# EAGLE board MPR121-Cap-Touch-Keypad-Panel-v13 (EAGLE 6.5.0)
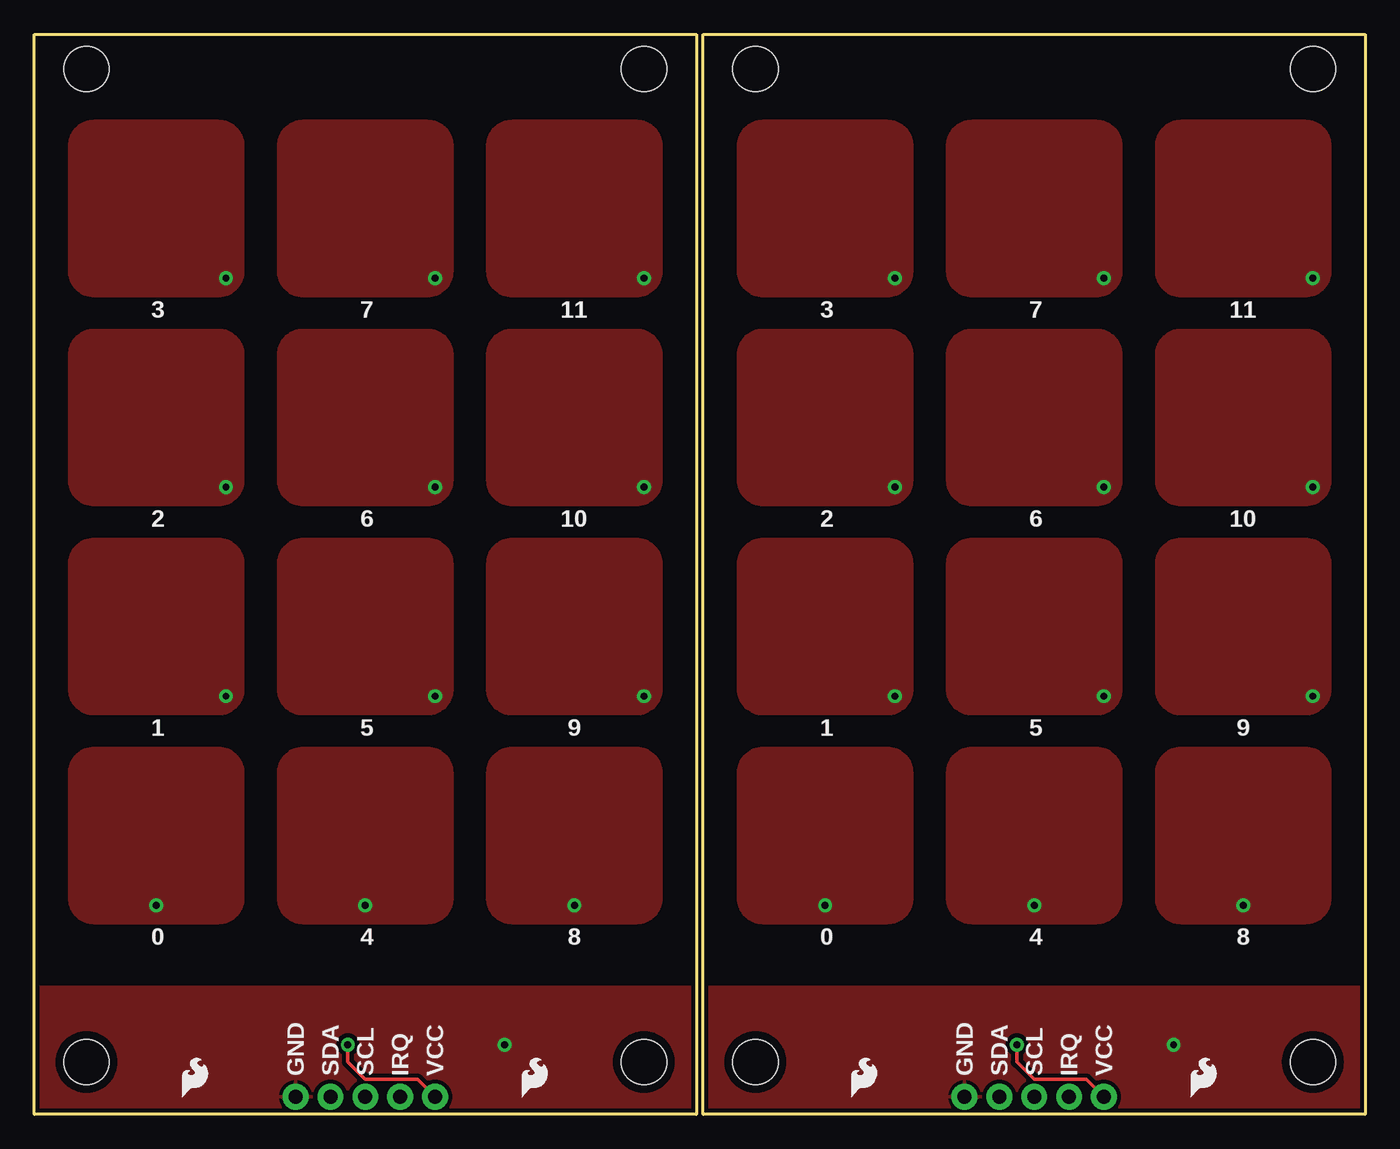
[diagram p0: board, top side]
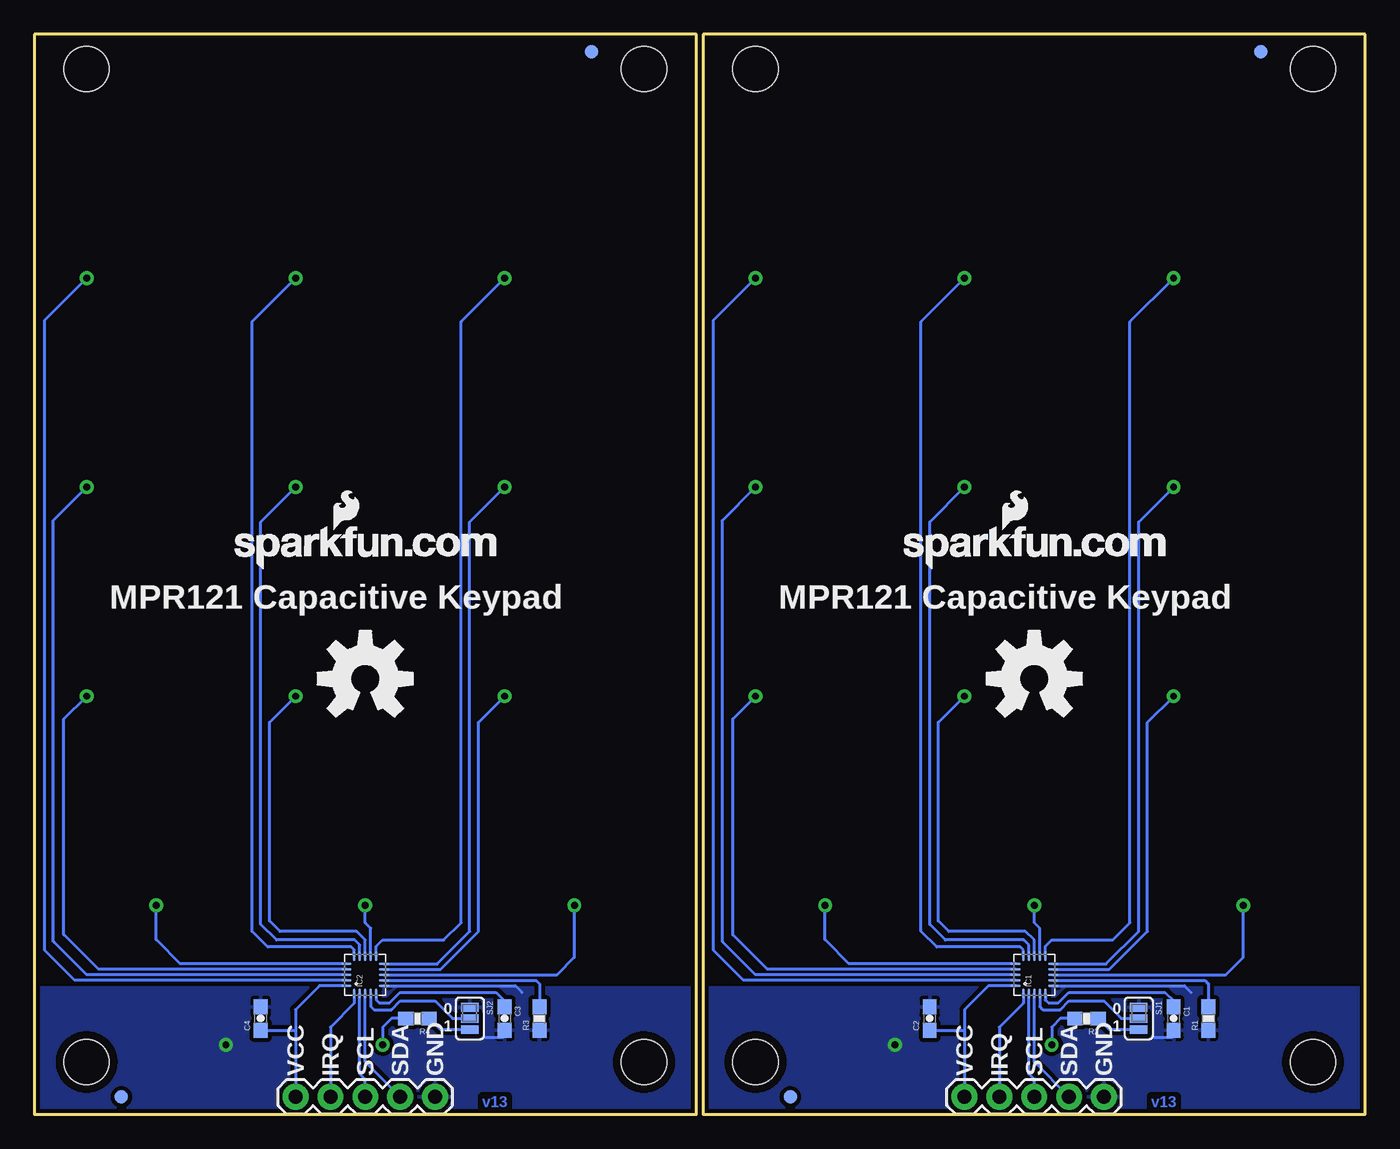
[diagram p1: board, bottom side, seen from below]

Size 97.03 x 78.74 mm. Coordinates in mm from the lower left corner, seen from the top.
Outline: 48.26,0 0,0 0,78.74 48.26,78.74 48.26,0
Outline: 97.03,0 48.77,0 48.77,78.74 97.03,78.74 97.03,0
Copper layers (1*16): Top 0.035mm / dielectric 1.5mm / Bottom 0.035mm
Design rules "SparkFun *": minimum track width 8mil, minimum drill 20mil, track to track 8mil, track to pad 8mil, pad to pad 8mil, via to via 8mil, smd to smd 8mil, copper to edge 8mil, drill to drill 8mil, minimum pad ring 12mil, minimum via ring 10mil, stop-mask expansion 4mil, vias tented up to drill 20mil, thermal gap 10mil

## Footprints (pad centres in the part's own frame; a part is rotated, then mirrored left to right if it is on the bottom)
0603-CAP = smd 1.1 x 1: 1 -0.85,0; 2 0.85,0
QFN-20-0.4MM-V2 = smd 0.75 x 0.195: 1 -1.367,0.8; 2 -1.367,0.4; 3 -1.367,0; 4 -1.367,-0.4; 5 -1.367,-0.8; 11 1.375,-0.8; 12 1.375,-0.4; 13 1.375,0; 14 1.375,0.4; 15 1.375,0.8 | smd 0.195 x 0.75: 6 -0.795,-1.372; 7 -0.395,-1.372; 8 0.005,-1.372; 9 0.405,-1.372; 10 0.805,-1.372; 16 0.81,1.372; 17 0.41,1.372; 18 0.01,1.372; 19 -0.39,1.372; 20 -0.79,1.372
STAND-OFF = hole 3.302: 0,0
FIDUCIAL-1X2 = smd 1 x 1: 1 0,0
1X05 = drill 1.016 pad 1.88: 1 0,0; 2 2.54,0; 3 5.08,0; 4 7.62,0; 5 10.16,0
0603-RES = smd 1.1 x 1: 1 -0.85,0; 2 0.85,0
SJ_3_PASTE1&2 = smd 0.635 x 1.27: 1 -0.813,0; 2 0,0; 3 0.813,0

## Placement (x,y rotation side)
C1  0.1uF  [0603-CAP]  13.97,6.99 270 bottom
C2  0.1uF  [0603-CAP]  31.75,6.99 90 bottom
C3  0.1uF  [0603-CAP]  62.74,6.99 270 bottom
C4  0.1uF  [0603-CAP]  80.52,6.99 90 bottom
IC1  MPR121  [QFN-20-0.4MM-V2]  24.13,10.16 90 bottom
IC2  MPR121  [QFN-20-0.4MM-V2]  72.9,10.16 90 bottom
JP1  LOGO-SFENEW  [SFE-NEW-WEBLOGO]  33.66,39.75 0 bottom
JP2  LOGO-SFESK  [SFE-LOGO-FLAME]  10.79,1.27 0 top
JP3  STAND-OFF  [STAND-OFF]  44.45,3.81 0 bottom
JP4  STAND-OFF  [STAND-OFF]  3.81,3.81 0 bottom
JP5  FIDUCIAL1X2  [FIDUCIAL-1X2]  7.62,77.47 0 bottom
JP6  LOGO-SFESK  [SFE-LOGO-FLAME]  35.56,1.27 0 top
JP7  STAND-OFF  [STAND-OFF]  44.45,76.2 0 bottom
JP8  STAND-OFF  [STAND-OFF]  3.81,76.2 0 bottom
JP9  [1X05]  19.05,1.27 180 bottom
JP10  FIDUCIAL1X2  [FIDUCIAL-1X2]  41.91,1.27 0 bottom
JP11  LOGO-SFENEW  [SFE-NEW-WEBLOGO]  82.42,39.75 0 bottom
JP12  STAND-OFF  [STAND-OFF]  93.22,3.81 0 bottom
JP13  STAND-OFF  [STAND-OFF]  52.58,3.81 0 bottom
JP14  LOGO-SFESK  [SFE-LOGO-FLAME]  59.56,1.27 0 top
JP15  LOGO-SFESK  [SFE-LOGO-FLAME]  84.33,1.27 0 top
JP16  STAND-OFF  [STAND-OFF]  93.22,76.2 0 bottom
JP17  STAND-OFF  [STAND-OFF]  52.58,76.2 0 bottom
JP18  [1X05]  67.82,1.27 180 bottom
JP19  FIDUCIAL1X2  [FIDUCIAL-1X2]  56.39,77.47 0 bottom
JP20  FIDUCIAL1X2  [FIDUCIAL-1X2]  90.68,1.27 0 bottom
LOGO1  OSHW-LOGOL  [OSHW-LOGO-L]  24.13,31.75 0 bottom
LOGO2  OSHW-LOGOL  [OSHW-LOGO-L]  72.9,31.75 0 bottom
R1  75k  [0603-RES]  11.43,6.99 90 bottom
R2  10K  [0603-RES]  20.32,6.99 180 bottom
R3  75k  [0603-RES]  60.2,6.99 90 bottom
R4  10K  [0603-RES]  69.09,6.99 180 bottom
SJ1  [SJ_3_PASTE1&2]  16.51,6.99 270 bottom
SJ2  [SJ_3_PASTE1&2]  65.28,6.99 270 bottom

## Library data of the parts
C1-C4 = SparkFun-Capacitors; PROD_ID: CAP-00810
IC1 IC2 = SparkFun-Sensors
JP1-JP20 R1 R3 = SparkFun
LOGO1 LOGO2 = SparkFun-Aesthetics
R2 R4 = SparkFun-Resistors; PROD_ID: RES-00824
SJ1 SJ2 = SparkFun-Passives

## Nets
GND: C1.2 C2.2 IC1.6 JP9.1 R1.1 SJ1.1
GND1: C3.2 C4.2 IC2.6 JP18.1 R3.1 SJ2.1
KEY0: IC1.8
KEY1: IC1.9
KEY2: IC1.10
KEY3: IC1.11
KEY4: IC1.12
KEY5: IC1.13
KEY6: IC1.14
KEY7: IC1.15
KEY8: IC1.16
KEY9: IC1.17
KEY10: IC1.18
KEY11: IC1.19
KEY12: IC2.19
KEY13: IC2.18
KEY14: IC2.17
KEY15: IC2.16
KEY16: IC2.15
KEY17: IC2.14
KEY18: IC2.13
KEY19: IC2.12
KEY20: IC2.11
KEY21: IC2.10
KEY22: IC2.9
KEY23: IC2.8
N$1: IC1.4 SJ1.2
N$2: R2.1 SJ1.3
N$3: IC2.4 SJ2.2
N$4: R4.1 SJ2.3
REXT: IC1.7 R1.2
REXT1: IC2.7 R3.2
SCL: IC1.2 JP9.3
SCL1: IC2.2 JP18.3
SDA: IC1.3 JP9.2
SDA1: IC2.3 JP18.2
VCC: C2.1 IC1.20 JP9.5 R2.2
VCC1: C4.1 IC2.20 JP18.5 R4.2
VREG: C1.1 IC1.5
VREG1: C3.1 IC2.5
~IRQ: IC1.1 JP9.4
~IRQ1: IC2.1 JP18.4

## Tracks (layer width: path | path; a pad name or v marks a point on that pad's centre or on a via)
GND  (via drill 0.51)
  Bottom 0.203: 14.1,5.59 15.37,5.59 | IC1.6 13.18,9.37 12.7,8.89
  other vias: 34.29,5.08
  pour Top (isolate 0.305): 48.26,0 48.13,9.27 0,9.27 0,0
  pour Bottom (isolate 0.305): 48.26,0 48.26,9.27 0,9.27 0,0
GND1  (via drill 0.51)
  Bottom 0.203: 62.87,5.59 64.14,5.59 | IC2.6 61.94,9.37 61.47,8.89
  other vias: 83.06,5.08
  pour Top (isolate 0.305): 97.03,0 96.9,9.27 48.77,9.27 48.77,0
  pour Bottom (isolate 0.305): 97.03,0 97.03,9.27 48.77,9.27 48.77,0
KEY0  (via drill 0.51)
  Bottom 0.203: v8.89,15.24 8.89,11.43 8.9,11.43 10.16,10.16 IC1.8
  pour Top (isolate 0.305): 13.44,13.97 arc90 15.24,15.77 15.24,24.87 arc90 13.44,26.67 4.34,26.67 arc90 2.54,24.87 2.54,15.77 arc90 4.34,13.97
KEY1  (via drill 0.51)
  Bottom 0.203: v13.97,30.48 15.88,28.57 15.88,13.34 18.66,10.56 IC1.9
  pour Top (isolate 0.305): 15.24,40.11 arc90 13.44,41.91 4.34,41.91 arc90 2.54,40.11 2.54,31.01 arc90 4.34,29.21 13.44,29.21 arc90 15.24,31.01
KEY2  (via drill 0.51)
  Bottom 0.203: v13.97,45.72 16.51,43.18 16.51,13.34 16.52,13.34 18.89,10.96 IC1.10
  pour Top (isolate 0.305): 15.24,55.35 arc90 13.44,57.15 4.34,57.15 arc90 2.54,55.35 2.54,46.25 arc90 4.34,44.45 13.44,44.45 arc90 15.24,46.25
KEY3  (via drill 0.51)
  Bottom 0.203: v13.97,60.96 17.14,57.78 17.14,13.97 18.41,12.7 22.86,12.7 23.33,12.23 IC1.11
  pour Top (isolate 0.305): 15.24,70.59 arc90 13.44,72.39 4.34,72.39 arc90 2.54,70.59 2.54,61.49 arc90 4.34,59.69 13.44,59.69 arc90 15.24,61.49
KEY4  (via drill 0.51)
  Bottom 0.203: v24.13,15.24 24.13,13.97 23.73,13.57 IC1.12
  pour Top (isolate 0.305): 28.68,13.97 arc90 30.48,15.77 30.48,24.87 arc90 28.68,26.67 19.58,26.67 arc90 17.78,24.87 17.78,15.77 arc90 19.58,13.97
KEY5  (via drill 0.51)
  Bottom 0.203: v29.21,30.48 31.11,28.57 31.11,14.1 30.35,13.34 24.77,13.34 24.13,12.7 IC1.13
  pour Top (isolate 0.305): 30.48,40.11 arc90 28.68,41.91 19.58,41.91 arc90 17.78,40.11 17.78,31.01 arc90 19.58,29.21 28.68,29.21 arc90 30.48,31.01
KEY6  (via drill 0.51)
  Bottom 0.203: v29.21,45.72 31.75,43.18 31.75,13.84 30.61,12.7 24.89,12.7 24.53,12.34 IC1.14
  pour Top (isolate 0.305): 30.48,55.35 arc90 28.68,57.15 19.58,57.15 arc90 17.78,55.35 17.78,46.25 arc90 19.58,44.45 28.68,44.45 arc90 30.48,46.25
KEY7  (via drill 0.51)
  Bottom 0.203: v29.21,60.96 32.38,57.78 32.38,13.34 31.24,12.19 25.15,12.19 24.93,11.98 IC1.15
  pour Top (isolate 0.305): 30.48,70.59 arc90 28.68,72.39 19.58,72.39 arc90 17.78,70.59 17.78,61.49 arc90 19.58,59.69 28.68,59.69 arc90 30.48,61.49
KEY8  (via drill 0.51)
  Bottom 0.203: v39.37,15.24 39.37,12.7 39.35,12.7 37.62,10.97 IC1.16
  pour Top (isolate 0.305): 45.72,24.87 arc90 43.92,26.67 34.82,26.67 arc90 33.02,24.87 33.02,15.77 arc90 34.82,13.97 43.92,13.97 arc90 45.72,15.77
KEY9  (via drill 0.51)
  Bottom 0.203: v44.45,30.48 46.1,28.83 46.1,13.08 46.08,13.08 43.57,10.57 IC1.17
  pour Top (isolate 0.305): 45.72,40.11 arc90 43.92,41.91 34.82,41.91 arc90 33.02,40.11 33.02,31.01 arc90 34.82,29.21 43.92,29.21 arc90 45.72,31.01
KEY10  (via drill 0.51)
  Bottom 0.203: v44.45,45.72 46.86,43.31 46.86,12.57 46.84,12.57 44.44,10.17 IC1.18
  pour Top (isolate 0.305): 33.02,46.25 arc90 34.82,44.45 43.92,44.45 arc90 45.72,46.25 45.72,55.35 arc90 43.92,57.15 34.82,57.15 arc90 33.02,55.35
KEY11  (via drill 0.51)
  Bottom 0.203: v44.45,60.96 47.5,57.91 47.5,11.94 45.33,9.77 IC1.19
  pour Top (isolate 0.305): 34.82,72.39 arc90 33.02,70.59 33.02,61.49 arc90 34.82,59.69 43.92,59.69 arc90 45.72,61.49 45.72,70.59 arc90 43.92,72.39
KEY12  (via drill 0.51)
  Bottom 0.203: v93.22,60.96 96.27,57.91 96.27,11.94 94.1,9.77 IC2.19
  pour Top (isolate 0.305): 83.58,72.39 arc90 81.79,70.59 81.79,61.49 arc90 83.58,59.69 92.69,59.69 arc90 94.49,61.49 94.49,70.59 arc90 92.69,72.39
KEY13  (via drill 0.51)
  Bottom 0.203: v93.22,45.72 95.63,43.31 95.63,12.57 95.61,12.57 93.21,10.17 IC2.18
  pour Top (isolate 0.305): 81.79,46.25 arc90 83.58,44.45 92.69,44.45 arc90 94.49,46.25 94.49,55.35 arc90 92.69,57.15 83.58,57.15 arc90 81.79,55.35
KEY14  (via drill 0.51)
  Bottom 0.203: v93.22,30.48 94.87,28.83 94.87,13.08 94.85,13.08 92.34,10.57 IC2.17
  pour Top (isolate 0.305): 94.49,40.11 arc90 92.69,41.91 83.58,41.91 arc90 81.79,40.11 81.79,31.01 arc90 83.58,29.21 92.69,29.21 arc90 94.49,31.01
KEY15  (via drill 0.51)
  Bottom 0.203: v88.14,15.24 88.14,12.7 88.12,12.7 86.39,10.97 IC2.16
  pour Top (isolate 0.305): 94.49,24.87 arc90 92.69,26.67 83.58,26.67 arc90 81.79,24.87 81.79,15.77 arc90 83.58,13.97 92.69,13.97 arc90 94.49,15.77
KEY16  (via drill 0.51)
  Bottom 0.203: v77.98,60.96 81.15,57.78 81.15,13.34 80.01,12.19 73.91,12.19 73.7,11.98 IC2.15
  pour Top (isolate 0.305): 79.25,70.59 arc90 77.45,72.39 68.34,72.39 arc90 66.55,70.59 66.55,61.49 arc90 68.34,59.69 77.45,59.69 arc90 79.25,61.49
KEY17  (via drill 0.51)
  Bottom 0.203: v77.98,45.72 80.52,43.18 80.52,13.84 79.38,12.7 73.66,12.7 73.3,12.34 IC2.14
  pour Top (isolate 0.305): 79.25,55.35 arc90 77.45,57.15 68.34,57.15 arc90 66.55,55.35 66.55,46.25 arc90 68.34,44.45 77.45,44.45 arc90 79.25,46.25
KEY18  (via drill 0.51)
  Bottom 0.203: v77.98,30.48 79.88,28.57 79.88,14.1 79.12,13.34 73.53,13.34 72.9,12.7 IC2.13
  pour Top (isolate 0.305): 79.25,40.11 arc90 77.45,41.91 68.34,41.91 arc90 66.55,40.11 66.55,31.01 arc90 68.34,29.21 77.45,29.21 arc90 79.25,31.01
KEY19  (via drill 0.51)
  Bottom 0.203: v72.9,15.24 72.9,13.97 72.5,13.57 IC2.12
  pour Top (isolate 0.305): 77.45,13.97 arc90 79.25,15.77 79.25,24.87 arc90 77.45,26.67 68.34,26.67 arc90 66.55,24.87 66.55,15.77 arc90 68.34,13.97
KEY20  (via drill 0.51)
  Bottom 0.203: v62.74,60.96 65.91,57.78 65.91,13.97 67.18,12.7 71.63,12.7 72.1,12.23 IC2.11
  pour Top (isolate 0.305): 64.01,70.59 arc90 62.21,72.39 53.1,72.39 arc90 51.31,70.59 51.31,61.49 arc90 53.1,59.69 62.21,59.69 arc90 64.01,61.49
KEY21  (via drill 0.51)
  Bottom 0.203: v62.74,45.72 65.28,43.18 65.28,13.34 65.29,13.34 67.66,10.96 IC2.10
  pour Top (isolate 0.305): 64.01,55.35 arc90 62.21,57.15 53.1,57.15 arc90 51.31,55.35 51.31,46.25 arc90 53.1,44.45 62.21,44.45 arc90 64.01,46.25
KEY22  (via drill 0.51)
  Bottom 0.203: v62.74,30.48 64.64,28.57 64.64,13.34 64.65,13.34 67.42,10.56 IC2.9
  pour Top (isolate 0.305): 64.01,40.11 arc90 62.21,41.91 53.1,41.91 arc90 51.31,40.11 51.31,31.01 arc90 53.1,29.21 62.21,29.21 arc90 64.01,31.01
KEY23  (via drill 0.51)
  Bottom 0.203: v57.66,15.24 57.66,11.43 57.67,11.43 58.93,10.16 IC2.8
  pour Top (isolate 0.305): 62.21,13.97 arc90 64.01,15.77 64.01,24.87 arc90 62.21,26.67 53.1,26.67 arc90 51.31,24.87 51.31,15.77 arc90 53.1,13.97
N$1
  Bottom 0.203: IC1.4 23.73,7.86 23.5,7.62 22.23,7.62 21.59,8.26 19.05,8.26 17.78,6.99 SJ1.2
N$2
  Bottom 0.203: SJ1.3 18.66,6.17 R2.1
N$3
  Bottom 0.203: IC2.4 72.5,7.86 72.26,7.62 70.99,7.62 70.36,8.26 67.82,8.26 66.55,6.99 SJ2.2
N$4
  Bottom 0.203: SJ2.3 67.42,6.17 R4.1
REXT
  Bottom 0.203: R1.2 11.43,9.53 11.67,9.77 IC1.7
REXT1
  Bottom 0.203: R3.2 60.2,9.53 60.44,9.77 IC2.7
SCL
  Bottom 0.203: IC1.2 24.53,2.94 24.13,2.54 JP9.3
SCL1
  Bottom 0.203: IC2.2 73.3,2.94 72.9,2.54 JP18.3
SDA
  Bottom 0.203: IC1.3 24.13,3.81 JP9.2
SDA1
  Bottom 0.203: IC2.3 72.9,3.81 JP18.2
VCC  (via drill 0.51)
  Top 0.254: v22.86,5.08 22.86,3.81 24.13,2.54 27.94,2.54 JP9.5
  Bottom 0.203: IC1.20 27.46,9.37 29.21,7.62 29.21,6.1 | 29.21,6.1 JP9.5 | R2.2 22.23,6.99 22.86,6.35 v22.86,5.08 | C2.1 29.25,6.13 29.21,6.1
VCC1  (via drill 0.51)
  Top 0.254: v71.63,5.08 71.63,3.81 72.9,2.54 76.71,2.54 JP18.5
  Bottom 0.203: IC2.20 76.23,9.37 77.98,7.62 77.98,6.1 | 77.98,6.1 JP18.5 | R4.2 70.99,6.99 71.63,6.35 v71.63,5.08 | C4.1 78.02,6.13 77.98,6.1
VREG
  Bottom 0.203: IC1.5 23.33,8.34 23.11,8.13 22.35,8.13 21.59,8.89 14.61,8.89 13.97,8.26 C1.1 13.97,7.62
VREG1
  Bottom 0.203: IC2.5 72.1,8.34 71.88,8.13 71.12,8.13 70.36,8.89 63.37,8.89 62.74,8.26 C3.1 62.74,7.62
~IRQ
  Bottom 0.203: IC1.1 24.93,8.09 26.67,6.35 JP9.4
~IRQ1
  Bottom 0.203: IC2.1 73.7,8.09 75.44,6.35 JP18.4

## Text on the board
Bottom: v13 | v13
tPlace: 3 | 7 | 11 | 3 | 7 | 11 | 2 | 6 | 10 | 2 | 6 | 10 | 1 | 5 | 9 | 1 | 5 | 9 | 0 | 4 | 8 | 0 | 4 | 8 | GND | SDA | SCL | IRQ | VCC | GND | SDA | SCL | IRQ | VCC
bPlace: MPR121 Capacitive Keypad | MPR121 Capacitive Keypad | 0 | 0 | 1 | 1 | GND | SDA | SCL | IRQ | VCC | GND | SDA | SCL | IRQ | VCC
Reference: vcc | irq | scl | sda | gnd | vcc | irq | scl | sda | gnd